# EAGLE board STM32F103C8T6-breakout-board_protoboard (EAGLE 9.4.2)
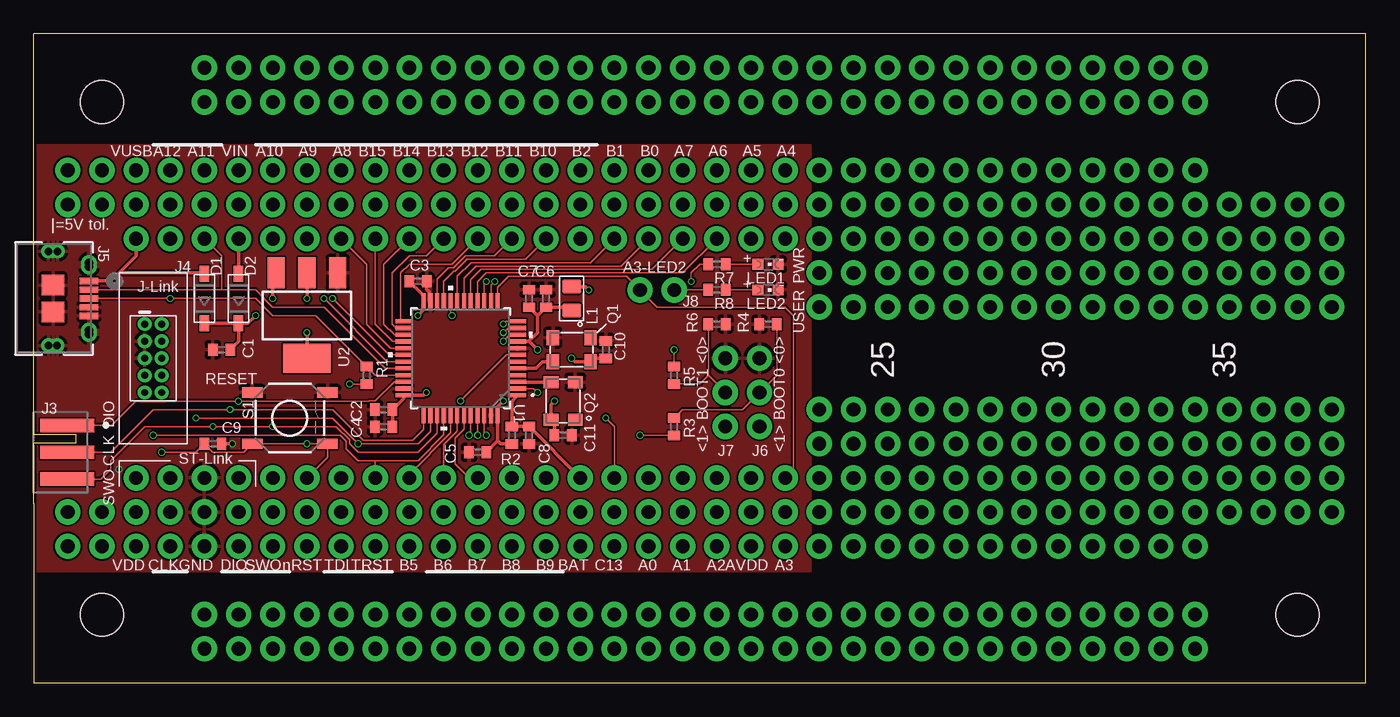
[diagram p0: board, top side]
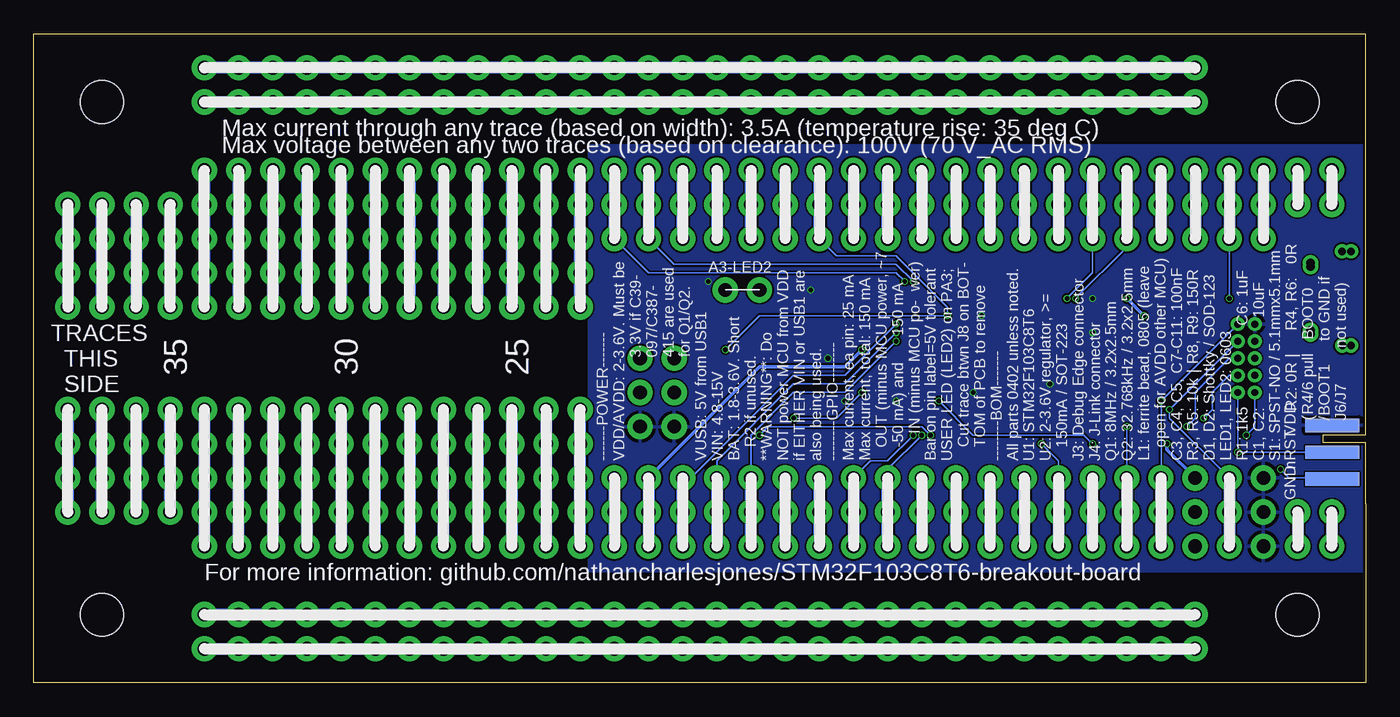
[diagram p1: board, bottom side, seen from below]

Size 99.06 x 48.26 mm. Coordinates in mm from the lower left corner, seen from the top.
Outline: 99.06,0 99.06,48.26 0,48.26 0,34.92 0,18.44 3.17,18.44 3.17,17.86 0,17.86 0,13.34 0,0 99.06,0
Copper layers (1*16): Top 0.035mm / dielectric 1.6mm / Bottom 0.035mm
Design rules "jlcpcb-2layers": minimum track width 5mil, minimum drill 0.3mm, track to track 5mil, track to pad 5mil, pad to pad 5mil, via to via 5mil, smd to smd 5mil, copper to edge 0.2mm, drill to drill 6mil, minimum pad ring 10mil, minimum via ring 3mil, stop-mask expansion 4mil, vias tented up to drill 0mil, thermal gap 10mil
Holes 3.17 mm at 93.98,43.18 93.98,5.08 5.08,43.18 5.08,5.08

## Footprints (pad centres in the part's own frame; a part is rotated, then mirrored left to right if it is on the bottom)
C0402 = smd 0.7 x 0.9: 1 -0.65,0; 2 0.65,0
SOD-123 = smd 1.2 x 0.7: A 1.85,0; C -1.85,0
1X20_NOSILK = drill 1.016 pad 1.88: 1 0,0; 2 2.54,0; 3 5.08,0; 4 7.62,0; 5 10.16,0; 6 12.7,0; 7 15.24,0; 8 17.78,0; 9 20.32,0; 10 22.86,0; 11 25.4,0; 12 27.94,0; 13 30.48,0; 14 33.02,0; 15 35.56,0; 16 38.1,0; 17 40.64,0; 18 43.18,0; 19 45.72,0; 20 48.26,0
AVX_6-PIN_009159006061916_0 = smd 1 x 4: 1 -2,2.5; 2 0,2.5; 3 2,2.5 | smd 1 x 4 bottom: 4 -2,2.5; 5 0,2.5; 6 2,2.5
2X5-PTH-1.27MM = drill 0.508 pad 1: 1 -2.54,-0.635; 2 -2.54,0.635; 3 -1.27,-0.635; 4 -1.27,0.635; 5 0,-0.635; 6 0,0.635; 7 1.27,-0.635; 8 1.27,0.635; 9 2.54,-0.635; 10 2.54,0.635
CONN_10118194-0001LF_AMP = smd 0.457 x 1.346: 1 -1.3,2.594; 2 -0.65,2.594; 3 0,2.594; 4 0.65,2.594; 5 1.3,2.594 | smd 1.499 x 1.651: 10 -1,-0.081; 11 1,-0.081 | smd 1.016 x 1.702: S_1 -3.5,-0.081 | drill 0.559 pad 0.559: S_1_H1 -3.505,0.254; S_1_H2 -3.505,-0.432; S_2_H1 3.505,0.229; S_2_H2 3.505,-0.406 | smd 1.016 x 1.651: S_2 3.5,-0.081 | smd 1.295 x 1.016: S_3 -2.5,2.594; S_4 2.5,2.594 | drill 0.61 pad 0.61: S_3_H1 -2.362,2.591; S_3_H2 -2.642,2.591; S_4_H1 2.642,2.591; S_4_H2 2.362,2.591
1X03_NO_SILK = drill 1.016 pad 1.88: 1 0,0; 2 2.54,0; 3 5.08,0
1X02_NO_SILK = drill 1.016 pad 1.88: 1 0,0; 2 2.54,0
1X04_NO_SILK = drill 1.016 pad 1.88: 1 0,0; 2 2.54,0; 3 5.08,0; 4 7.62,0
1X05_NO_SILK = drill 1.016 pad 1.88: 1 0,0; 2 2.54,0; 3 5.08,0; 4 7.62,0; 5 10.16,0
1X30_NO_SILK = drill 1.016 pad 1.88: 1 0,0; 2 2.54,0; 3 5.08,0; 4 7.62,0; 5 10.16,0; 6 12.7,0; 7 15.24,0; 8 17.78,0; 9 20.32,0; 10 22.86,0; 11 25.4,0; 12 27.94,0; 13 30.48,0; 14 33.02,0; 15 35.56,0; 16 38.1,0; 17 40.64,0; 18 43.18,0; 19 45.72,0; 20 48.26,0; 21 50.8,0; 22 53.34,0; 23 55.88,0; 24 58.42,0; 25 60.96,0; 26 63.5,0; 27 66.04,0; 28 68.58,0; 29 71.12,0; 30 73.66,0
L0805 = smd 1.016 x 1.397: 1 -0.889,0; 2 0.889,0
CHIPLED_0603 = smd 0.8 x 0.8: A 0,-0.75; C 0,0.75
3.2X2.5_KXO-84-TCXO = smd 0.9 x 1.1: 1 -1.4,-0.9; 2 1.4,-0.9; 3 1.4,0.9; 4 -1.4,0.9
R0402 = smd 0.7 x 0.9: 1 -0.65,0; 2 0.65,0
TACTILE_SWITCH_SMD_5.2MM = smd 1.524 x 0.762: 1 -2.794,1.905; 2 2.794,1.905; 3 -2.794,-1.905; 4 2.794,-1.905
LQFP48-7X7MM = smd 1.194 x 0.305: 1 -4.25,2.75; 2 -4.25,2.25; 3 -4.25,1.75; 4 -4.25,1.25; 5 -4.25,0.75; 6 -4.25,0.25; 7 -4.25,-0.25; 8 -4.25,-0.75; 9 -4.25,-1.25; 10 -4.25,-1.75; 11 -4.25,-2.25; 12 -4.25,-2.75; 25 4.25,-2.75; 26 4.25,-2.25; 27 4.25,-1.75; 28 4.25,-1.25; 29 4.25,-0.75; 30 4.25,-0.25; 31 4.25,0.25; 32 4.25,0.75; 33 4.25,1.25; 34 4.25,1.75; 35 4.25,2.25; 36 4.25,2.75 | smd 0.305 x 1.194: 13 -2.75,-4.25; 14 -2.25,-4.25; 15 -1.75,-4.25; 16 -1.25,-4.25; 17 -0.75,-4.25; 18 -0.25,-4.25; 19 0.25,-4.25; 20 0.75,-4.25; 21 1.25,-4.25; 22 1.75,-4.25; 23 2.25,-4.25; 24 2.75,-4.25; 37 2.75,4.25; 38 2.25,4.25; 39 1.75,4.25; 40 1.25,4.25; 41 0.75,4.25; 42 0.25,4.25; 43 -0.25,4.25; 44 -0.75,4.25; 45 -1.25,4.25; 46 -1.75,4.25; 47 -2.25,4.25; 48 -2.75,4.25
SOT-223 = smd 1.27 x 2.286: 1 -2.286,-3.175; 2 0,-3.175; 3 2.286,-3.175 | smd 3.556 x 2.159: TER 0,3.175

## Placement (x,y rotation side)
C1  10uF  [C0402]  13.97,24.77 180 top
C2  10uF  [C0402]  26.04,20.32 180 top
C3  100nF  [C0402]  28.57,29.84 0 top
C4  100nF  [C0402]  26.04,19.05 180 top
C5  100nF  [C0402]  33.02,17.14 180 top
C6  1uF  [C0402]  38.1,28.57 90 top
C7  100nF  [C0402]  36.83,28.57 90 top
C8  100nF  [C0402]  36.83,18.41 270 top
C9  100nF  [C0402]  13.34,17.78 0 top
C10  100nF  [C0402]  42.55,24.77 90 top
C11  100nF  [C0402]  39.37,18.41 0 top
D1  [SOD-123]  12.7,28.57 90 top
D2  [SOD-123]  15.24,28.57 90 top
FRAME2  FRAME-LETTERNO_PACKAGE  [DUMMY]  -10.79,-57.15 0 top  (outside the outline)
J1  [1X20_NOSILK]  55.88,33.02 180 top
J2  [1X20_NOSILK]  55.88,15.24 180 top
J3  AVX_6-PIN_009159006061916  [AVX_6-PIN_009159006061916_0]  0,17.14 270 top
J4  CORTEX_DEBUG_PTH  [2X5-PTH-1.27MM]  8.89,24.13 270 top
J5  10118194-0001LF  [CONN_10118194-0001LF_AMP]  1.52,28.57 270 top
J6  [1X03_NO_SILK]  53.98,24.13 270 top
J7  [1X03_NO_SILK]  51.44,24.13 270 top
J8  [1X02_NO_SILK]  45.09,29.21 0 top
J9  [1X04_NO_SILK]  91.44,27.94 90 top
J10  [1X04_NO_SILK]  91.44,12.7 90 top
J11  [1X04_NO_SILK]  88.9,27.94 90 top
J12  [1X04_NO_SILK]  88.9,12.7 90 top
J13  [1X02_NO_SILK]  2.54,35.56 90 top
J14  [1X02_NO_SILK]  2.54,10.16 90 top
J15  [1X02_NO_SILK]  5.08,35.56 90 top
J16  [1X02_NO_SILK]  5.08,10.16 90 top
J17  [1X02_NO_SILK]  7.62,35.56 90 top
J18  [1X02_NO_SILK]  7.62,10.16 90 top
J19  [1X02_NO_SILK]  10.16,35.56 90 top
J20  [1X02_NO_SILK]  10.16,10.16 90 top
J21  [1X05_NO_SILK]  86.36,27.94 90 top
J22  [1X05_NO_SILK]  86.36,10.16 90 top
J23  [1X05_NO_SILK]  83.82,27.94 90 top
J24  [1X05_NO_SILK]  83.82,10.16 90 top
J25  [1X05_NO_SILK]  81.28,27.94 90 top
J26  [1X05_NO_SILK]  81.28,10.16 90 top
J27  [1X05_NO_SILK]  78.74,27.94 90 top
J28  [1X05_NO_SILK]  78.74,10.16 90 top
J29  [1X05_NO_SILK]  76.2,27.94 90 top
J30  [1X05_NO_SILK]  76.2,10.16 90 top
J31  [1X05_NO_SILK]  73.66,27.94 90 top
J32  [1X05_NO_SILK]  73.66,10.16 90 top
J33  [1X05_NO_SILK]  71.12,27.94 90 top
J34  [1X05_NO_SILK]  71.12,10.16 90 top
J35  [1X05_NO_SILK]  68.58,27.94 90 top
J36  [1X05_NO_SILK]  68.58,10.16 90 top
J37  [1X05_NO_SILK]  66.04,27.94 90 top
J38  [1X05_NO_SILK]  66.04,10.16 90 top
J39  [1X05_NO_SILK]  63.5,27.94 90 top
J40  [1X05_NO_SILK]  63.5,10.16 90 top
J41  [1X05_NO_SILK]  60.96,27.94 90 top
J42  [1X05_NO_SILK]  60.96,10.16 90 top
J43  [1X05_NO_SILK]  58.42,27.94 90 top
J44  [1X05_NO_SILK]  58.42,10.16 90 top
J45  [1X02_NO_SILK]  12.7,35.56 90 top
J46  [1X02_NO_SILK]  12.7,10.16 90 top
J47  [1X02_NO_SILK]  15.24,35.56 90 top
J48  [1X02_NO_SILK]  15.24,10.16 90 top
J49  [1X02_NO_SILK]  17.78,35.56 90 top
J50  [1X02_NO_SILK]  17.78,10.16 90 top
J51  [1X02_NO_SILK]  20.32,35.56 90 top
J52  [1X02_NO_SILK]  20.32,10.16 90 top
J53  [1X02_NO_SILK]  22.86,35.56 90 top
J54  [1X02_NO_SILK]  22.86,10.16 90 top
J55  [1X02_NO_SILK]  25.4,35.56 90 top
J56  [1X02_NO_SILK]  25.4,10.16 90 top
J57  [1X02_NO_SILK]  27.94,35.56 90 top
J58  [1X02_NO_SILK]  27.94,10.16 90 top
J59  [1X02_NO_SILK]  30.48,35.56 90 top
J60  [1X02_NO_SILK]  30.48,10.16 90 top
J61  [1X02_NO_SILK]  33.02,35.56 90 top
J62  [1X02_NO_SILK]  33.02,10.16 90 top
J63  [1X02_NO_SILK]  35.56,35.56 90 top
J64  [1X02_NO_SILK]  35.56,10.16 90 top
J65  [1X02_NO_SILK]  38.1,35.56 90 top
J66  [1X02_NO_SILK]  38.1,10.16 90 top
J67  [1X02_NO_SILK]  40.64,35.56 90 top
J68  [1X02_NO_SILK]  40.64,10.16 90 top
J69  [1X02_NO_SILK]  43.18,35.56 90 top
J70  [1X02_NO_SILK]  43.18,10.16 90 top
J71  [1X02_NO_SILK]  45.72,35.56 90 top
J72  [1X02_NO_SILK]  45.72,10.16 90 top
J73  [1X02_NO_SILK]  48.26,35.56 90 top
J74  [1X02_NO_SILK]  48.26,10.16 90 top
J75  [1X02_NO_SILK]  50.8,35.56 90 top
J76  [1X02_NO_SILK]  50.8,10.16 90 top
J77  [1X02_NO_SILK]  53.34,35.56 90 top
J78  [1X02_NO_SILK]  53.34,10.16 90 top
J79  [1X02_NO_SILK]  55.88,35.56 90 top
J80  [1X02_NO_SILK]  55.88,10.16 90 top
J89  [1X30_NO_SILK]  12.7,5.08 0 top
J90  [1X30_NO_SILK]  12.7,2.54 0 top
J91  [1X04_NO_SILK]  96.52,27.94 90 top
J92  [1X04_NO_SILK]  96.52,12.7 90 top
J93  [1X04_NO_SILK]  93.98,27.94 90 top
J94  [1X30_NO_SILK]  12.7,45.72 0 top
J95  [1X30_NO_SILK]  12.7,43.18 0 top
J96  [1X04_NO_SILK]  93.98,12.7 90 top
L1  470R-2A  [L0805]  40.01,28.57 90 top
LED1  [CHIPLED_0603]  54.61,31.11 270 top
LED2  [CHIPLED_0603]  54.61,29.21 270 top
Q1  [3.2X2.5_KXO-84-TCXO]  40.01,24.77 180 top
Q2  [3.2X2.5_KXO-84-TCXO]  39.37,20.95 90 top
R1  1k5  [R0402]  24.77,22.86 270 top
R2  0R  [R0402]  35.56,18.41 270 top
R3  10k  [R0402]  47.62,19.05 270 top
R4  0R  [R0402]  54.61,26.67 0 top
R5  10k  [R0402]  47.62,22.86 90 top
R6  0R  [R0402]  50.8,26.67 180 top
R7  150R  [R0402]  50.8,31.11 180 top
R8  150R  [R0402]  50.8,29.21 0 top
S1  MOMENTARY-SWITCH-SPST-SMD-5.2-REDUNDANT  [TACTILE_SWITCH_SMD_5.2MM]  19.05,19.68 0 top
U1  STM32F103C8T6  [LQFP48-7X7MM]  31.75,24.13 180 top
U2  CJT1117-3.3-SOT223  [SOT-223]  20.32,27.3 180 top

## Library data of the parts
C1 C2 = adafruit; LCSC_PART: C15525
C3-C5 C7-C11 = adafruit; LCSC_PART: C1525
C6 = adafruit; LCSC_PART: C52923
D1 D2 = adafruit; LCSC_PART: C8598
FRAME2 = SparkFun-Aesthetics; DESIGNER: Nathan Jones; VERSION: v01
J1 J2 J4 J6-J8 J13-J80 J89 J90 J94 J95 = SparkFun-Connectors
J3 = Debug-Edge_AVX-connectors
J5 = USB-micro-B_Amphenol_10118194-0001LF; BUILT_BY: EMA_Cory; COPYRIGHT: Copyright (C) 2018 Accelerated Designs. All rights reserved; DATASHEET: https://www.amphenol-icc.com/media/wysiwyg/files/drawing/10118194.pdf; MANUFACTURER_PART_NUMBER: 10118194-0001LF; SOURCELIBRARY: Amphenol_ICC_2020-04-09; VENDOR: Amphenol
J9-J12 J91-J93 J96 = SparkFun-Connectors; PROD_ID: CONN-09696
L1 = OPL_Ferrite_and_Magnetic_Bead; LCSC_PART: C1015; MPN: WLB2012-471T20
LED1 = adafruit; LCSC_PART: C72041
LED2 = adafruit; LCSC_PART: C72038
Q1 = crystal-geyer_V1_0; LCSC_PART: C39097
Q2 = crystal-geyer_V1_0; LCSC_PART: C387415
R1 = adafruit; LCSC_PART: C25867
R2 R4 R6 = adafruit; LCSC_PART: C17168
R3 R5 = adafruit; LCSC_PART: C25744
R7 R8 = adafruit; LCSC_PART: C25082
S1 = SparkFun-Switches; LCSC_PART: C318884; PROD_ID: SWCH-08247; SF_SKU: COM-08720
U1 = STM32F103C8T6; BUILT_BY: EMA_UL_Team; COPYRIGHT: Copyright (C) 2018 Accelerated Designs. All rights reserved; LCSC_PART: C94046; MANUFACTURER_PART_NUMBER: STM32F103C8T6; SOURCELIBRARY: Updates_to_database_2020-10-19; VENDOR: STMicroelectronics
U2 = OPL_IC; LCSC_PART: C6186; MPN: CJT1117-3.3

## Nets
AVDD: C6.1 C7.1 J2.2 J78.1 J78.2 L1.1 U1.9
BOOT0: R3.2 U1.44
BOOT1*: J1.7 J67.1 J67.2 R5.2 U1.20
GND: C1.2 C2.2 C3.2 C4.2 C5.2 C6.2 C7.2 C8.2 C9.2 C10.2 C11.2 J2.18 J3.6 J4.3 J4.5 J5.4 J5.5 J5.10 J5.11 J5.S_1 J5.S_1_H1 J5.S_1_H2 J5.S_2 J5.S_2_H1 J5.S_2_H2 J5.S_3 J5.S_3_H1 J5.S_3_H2 J5.S_4 J5.S_4_H1 J5.S_4_H2 J6.1 J7.1 J46.1 J46.2 LED1.C LED2.C Q1.2 Q2.2 R4.1 R6.1 S1.1 S1.2 U1.8 U1.23 U1.35 U1.47 U2.1
JTDI*: J2.14 J4.8 J54.1 J54.2 U1.38
JTRST*: J2.13 J4.9 J56.1 J56.2 U1.40
N$1: J90.1 J90.2 J90.3 J90.4 J90.5 J90.6 J90.7 J90.8 J90.9 J90.10 J90.11 J90.12 J90.13 J90.14 J90.15 J90.16 J90.17 J90.18 J90.19 J90.20 J90.21 J90.22 J90.23 J90.24 J90.25 J90.26 J90.27 J90.28 J90.29 J90.30
N$2: J89.1 J89.2 J89.3 J89.4 J89.5 J89.6 J89.7 J89.8 J89.9 J89.10 J89.11 J89.12 J89.13 J89.14 J89.15 J89.16 J89.17 J89.18 J89.19 J89.20 J89.21 J89.22 J89.23 J89.24 J89.25 J89.26 J89.27 J89.28 J89.29 J89.30
N$3: J95.1 J95.2 J95.3 J95.4 J95.5 J95.6 J95.7 J95.8 J95.9 J95.10 J95.11 J95.12 J95.13 J95.14 J95.15 J95.16 J95.17 J95.18 J95.19 J95.20 J95.21 J95.22 J95.23 J95.24 J95.25 J95.26 J95.27 J95.28 J95.29 J95.30
N$4: J94.1 J94.2 J94.3 J94.4 J94.5 J94.6 J94.7 J94.8 J94.9 J94.10 J94.11 J94.12 J94.13 J94.14 J94.15 J94.16 J94.17 J94.18 J94.19 J94.20 J94.21 J94.22 J94.23 J94.24 J94.25 J94.26 J94.27 J94.28 J94.29 J94.30
N$5: J92.1 J92.2 J92.3 J92.4
N$6: J96.1 J96.2 J96.3 J96.4
N$7: J10.1 J10.2 J10.3 J10.4
N$8: J12.1 J12.2 J12.3 J12.4
N$9: J22.1 J22.2 J22.3 J22.4 J22.5
N$10: J24.1 J24.2 J24.3 J24.4 J24.5
N$11: J26.1 J26.2 J26.3 J26.4 J26.5
N$12: J28.1 J28.2 J28.3 J28.4 J28.5
N$13: J30.1 J30.2 J30.3 J30.4 J30.5
N$14: J32.1 J32.2 J32.3 J32.4 J32.5
N$15: J34.1 J34.2 J34.3 J34.4 J34.5
N$16: J36.1 J36.2 J36.3 J36.4 J36.5
N$17: J38.1 J38.2 J38.3 J38.4 J38.5
N$18: J40.1 J40.2 J40.3 J40.4 J40.5
N$19: J42.1 J42.2 J42.3 J42.4 J42.5
N$20: J44.1 J44.2 J44.3 J44.4 J44.5
N$21: J13.1 J13.2
N$22: J14.1 J14.2
N$23: J16.1 J16.2
N$24: J15.1 J15.2
N$40: J91.1 J91.2 J91.3 J91.4
N$41: J93.1 J93.2 J93.3 J93.4
N$42: J9.1 J9.2 J9.3 J9.4
N$43: J11.1 J11.2 J11.3 J11.4
N$44: J21.1 J21.2 J21.3 J21.4 J21.5
N$45: J23.1 J23.2 J23.3 J23.4 J23.5
N$46: J25.1 J25.2 J25.3 J25.4 J25.5
N$47: J27.1 J27.2 J27.3 J27.4 J27.5
N$48: J29.1 J29.2 J29.3 J29.4 J29.5
N$49: J31.1 J31.2 J31.3 J31.4 J31.5
N$50: J33.1 J33.2 J33.3 J33.4 J33.5
N$51: J35.1 J35.2 J35.3 J35.4 J35.5
N$52: J37.1 J37.2 J37.3 J37.4 J37.5
N$53: J39.1 J39.2 J39.3 J39.4 J39.5
N$54: J41.1 J41.2 J41.3 J41.4 J41.5
N$55: J43.1 J43.2 J43.3 J43.4 J43.5
N$81: J6.2 R3.1 R4.2
N$82: J7.2 R5.1 R6.2
N$83: LED2.A R8.2
N$84: LED1.A R7.1
NRST: C9.1 J2.15 J3.5 J4.10 J52.1 J52.2 S1.3 S1.4 U1.7
OSC32_IN: Q2.3 U1.3
OSC32_OUT: U1.4
OSC_IN: Q1.3 U1.5
OSC_OUT: U1.6
PA0: J2.5 J72.1 J72.2 U1.10
PA1: J2.4 J74.1 J74.2 U1.11
PA2: J2.3 J76.1 J76.2 U1.12
PA3: J2.1 J8.1 J8.2 J80.1 J80.2 R8.1 U1.13
PA4: J1.1 J79.1 J79.2 U1.14
PA5: J1.2 J77.1 J77.2 U1.15
PA6: J1.3 J75.1 J75.2 U1.16
PA7: J1.4 J73.1 J73.2 U1.17
PA8*: J1.14 J53.1 J53.2 U1.29
PA9*: J1.15 J51.1 J51.2 U1.30
PA10*: J1.16 J49.1 J49.2 U1.31
PB0: J1.5 J71.1 J71.2 U1.18
PB1: J1.6 J69.1 J69.2 U1.19
PB5: J2.12 J58.1 J58.2 U1.41
PB6*: J2.11 J60.1 J60.2 U1.42
PB7*: J2.10 J62.1 J62.2 U1.43
PB8*: J2.9 J64.1 J64.2 U1.45
PB9*: J2.8 J66.1 J66.2 U1.46
PB10*: J1.8 J65.1 J65.2 U1.21
PB11*: J1.9 J63.1 J63.2 U1.22
PB12*: J1.10 J61.1 J61.2 U1.25
PB13*: J1.11 J59.1 J59.2 U1.26
PB14*: J1.12 J57.1 J57.2 U1.27
PB15*: J1.13 J55.1 J55.2 U1.28
PC13: J2.6 J70.1 J70.2 U1.2
SWCLK*: J2.19 J3.2 J4.4 J20.1 J20.2 U1.37
SWDIO*: J2.17 J3.1 J4.2 J48.1 J48.2 U1.34
SWO*: J2.16 J3.3 J4.6 J50.1 J50.2 U1.39
USB_DM*: J1.18 J5.2 J45.1 J45.2 U1.32
USB_DP*: J1.19 J5.3 J19.1 J19.2 R1.1 U1.33
VBAT_1.8-3.6V: C8.1 J2.7 J68.1 J68.2 R2.1 U1.1
VDD: C2.1 C3.1 C4.1 C5.1 C10.1 C11.1 J2.20 J3.4 J4.1 J6.3 J7.3 J18.1 J18.2 L1.2 Q1.4 Q2.4 R1.2 R2.2 R7.2 U1.24 U1.36 U1.48 U2.2 U2.TER
VIN: C1.1 D1.C D2.C U2.3
VIN_4.8-15V: D2.A J1.17 J47.1 J47.2
VUSB: D1.A J1.20 J5.1 J17.1 J17.2

## Tracks (layer width: path | path; a pad name or v marks a point on that pad's centre or on a via)
AVDD  (via drill 0.35)
  Top 0.254: 36.81,25.38 37.47,26.04 37.47,27.3 | 37.47,27.3 38.09,27.93 C6.1 39.77,27.93 L1.1 | C7.1 36.84,27.93 37.47,27.3 | 36.81,25.38 36.85,25.38 v37.47,24.77 | 36.81,25.38 U1.9
  Bottom 0.254: v37.47,24.77 38.73,23.5 45.09,23.5 J2.2
  Bottom 0.889: J2.2 J78.2 J78.1
BOOT0  (via drill 0.35)
  Top 0.127: U1.44 32.5,18.53 v32.38,18.41 | R3.2 47.61,18.41 v45.09,18.41
  Bottom 0.127: v32.38,18.41 33.02,19.05 44.45,19.05 v45.09,18.41
BOOT1*  (via drill 0.35)
  Top 0.127: U1.20 31,27.42 v31.11,27.3 | v47.62,24.77 R5.2
  Bottom 0.127: J1.7 39.37,31.75 34.92,31.75 31.11,27.94 v31.11,27.3 45.09,27.3 v47.62,24.77
  Bottom 0.889: J1.7 J67.1 J67.2
GND  (via drill 0.35)
  Top 0.254: U1.23 29.41,28.47 29.41,29.08 29.23,29.26 C3.2 | C9.2 v14.79,17.78
  Bottom 0.127: J3.6 2.6,15.24 5.71,15.24 v6.35,15.88
  Bottom 0.254: v14.79,17.78 14.79,17.32 J2.18
  pour Top: 57.78,40.01 57.78,8.26 0,8.26 0,40.01
JTDI*  (via drill 0.35)
  Top 0.127: U1.38 29.5,18.7 28.57,17.78 v24.13,17.78 22.23,19.68 v12.06,19.68
  Bottom 0.127: J4.8 10.16,22.86 11.43,21.59 11.43,20.32 v12.06,19.68 | v24.13,17.78 22.86,16.51 J2.14
  Bottom 0.889: J2.14 J54.2 J54.1
JTRST*  (via drill 0.35)
  Top 0.127: U1.40 30.5,18.43 28.57,16.51 25.4,16.51 | 25.4,16.51 24.13,16.51 23.24,17.4 23.24,17.95 22.78,18.41 14.42,18.41 14.41,18.42 12.26,18.42 12.25,18.41 v8.89,18.41 | J2.13 25.4,16.51
  Bottom 0.127: J4.9 8.26,19.05 v8.89,18.41
  Bottom 0.889: J56.1 J56.2 J2.13
N$1
  Bottom 0.889: J90.30 J90.29 J90.28 J90.27 J90.26 J90.25 J90.24 J90.23 J90.22 J90.21 J90.20 J90.19 J90.18 J90.17 J90.16 J90.15 J90.14 J90.13 J90.12 J90.11 J90.10 J90.9 J90.8 J90.7 J90.6 J90.5 J90.4 J90.3 J90.2 J90.1
N$2
  Bottom 0.889: J89.1 J89.2 J89.3 J89.4 J89.5 J89.6 J89.7 J89.8 J89.9 J89.10 J89.11 J89.12 J89.13 J89.14 J89.15 J89.16 J89.17 J89.18 J89.19 J89.20 J89.21 J89.22 J89.23 J89.24 J89.25 J89.26 J89.27 J89.28 J89.29 J89.30
N$3
  Bottom 0.889: J95.30 J95.29 J95.28 J95.27 J95.26 J95.25 J95.24 J95.23 J95.22 J95.21 J95.20 J95.19 J95.18 J95.17 J95.16 J95.15 J95.14 J95.13 J95.12 J95.11 J95.10 J95.9 J95.8 J95.7 J95.6 J95.5 J95.4 J95.3 J95.2 J95.1
N$4
  Bottom 0.889: J94.1 J94.2 J94.3 J94.4 J94.5 J94.6 J94.7 J94.8 J94.9 J94.10 J94.11 J94.12 J94.13 J94.14 J94.15 J94.16 J94.17 J94.18 J94.19 J94.20 J94.21 J94.22 J94.23 J94.24 J94.25 J94.26 J94.27 J94.28 J94.29 J94.30
N$5
  Bottom 0.889: J92.4 J92.3 J92.2 J92.1
N$6
  Bottom 0.889: J96.1 J96.2 J96.3 J96.4
N$7
  Bottom 0.889: J10.4 J10.3 J10.2 J10.1
N$8
  Bottom 0.889: J12.1 J12.2 J12.3 J12.4
N$9
  Bottom 0.889: J22.5 J22.4 J22.3 J22.2 J22.1
N$10
  Bottom 0.889: J24.1 J24.2 J24.3 J24.4 J24.5
N$11
  Bottom 0.889: J26.5 J26.4 J26.3 J26.2 J26.1
N$12
  Bottom 0.889: J28.1 J28.2 J28.3 J28.4 J28.5
N$13
  Bottom 0.889: J30.5 J30.4 J30.3 J30.2 J30.1
N$14
  Bottom 0.889: J32.1 J32.2 J32.3 J32.4 J32.5
N$15
  Bottom 0.889: J34.5 J34.4 J34.3 J34.2 J34.1
N$16
  Bottom 0.889: J36.1 J36.2 J36.3 J36.4 J36.5
N$17
  Bottom 0.889: J38.5 J38.4 J38.3 J38.2 J38.1
N$18
  Bottom 0.889: J40.1 J40.2 J40.3 J40.4 J40.5
N$19
  Bottom 0.889: J42.5 J42.4 J42.3 J42.2 J42.1
N$20
  Bottom 0.889: J44.1 J44.2 J44.3 J44.4 J44.5
N$21
  Bottom 0.889: J13.2 J13.1
N$22
  Bottom 0.889: J14.2 J14.1
N$23
  Bottom 0.889: J16.2 J16.1
N$24
  Bottom 0.889: J15.1 J15.2
N$40
  Bottom 0.889: J91.4 J91.3 J91.2 J91.1
N$41
  Bottom 0.889: J93.1 J93.2 J93.3 J93.4
N$42
  Bottom 0.889: J9.4 J9.3 J9.2 J9.1
N$43
  Bottom 0.889: J11.1 J11.2 J11.3 J11.4
N$44
  Bottom 0.889: J21.5 J21.4 J21.3 J21.2 J21.1
N$45
  Bottom 0.889: J23.1 J23.2 J23.3 J23.4 J23.5
N$46
  Bottom 0.889: J25.5 J25.4 J25.3 J25.2 J25.1
N$47
  Bottom 0.889: J27.1 J27.2 J27.3 J27.4 J27.5
N$48
  Bottom 0.889: J29.5 J29.4 J29.3 J29.2 J29.1
N$49
  Bottom 0.889: J31.1 J31.2 J31.3 J31.4 J31.5
N$50
  Bottom 0.889: J33.5 J33.4 J33.3 J33.2 J33.1
N$51
  Bottom 0.889: J35.1 J35.2 J35.3 J35.4 J35.5
N$52
  Bottom 0.889: J37.5 J37.4 J37.3 J37.2 J37.1
N$53
  Bottom 0.889: J39.1 J39.2 J39.3 J39.4 J39.5
N$54
  Bottom 0.889: J41.5 J41.4 J41.3 J41.2 J41.1
N$55
  Bottom 0.889: J43.1 J43.2 J43.3 J43.4 J43.5
N$81
  Top 0.127: R4.2 55.26,22.88 J6.2 52.7,20.32 48.24,20.32 R3.1
N$82
  Top 0.127: R5.1 47.64,22.23 49.53,22.23 50.16,22.86 | J7.2 50.16,22.86 | R6.2 50.16,26.66 50.16,22.86
N$83
  Top 0.127: LED2.A R8.2
N$84
  Top 0.127: LED1.A R7.1
NRST  (via drill 0.35)
  Top 0.127: U1.7 35.17,24.38 v31.75,20.95 | v9.53,17.14 12.05,17.14 C9.1 13.32,17.14 13.55,17.14 13.56,17.14 15.62,17.14 S1.3 v20.32,17.78 S1.4 21.84,16.76 J2.15
  Bottom 0.127: J4.10 v9.53,17.14 J3.5 | v31.75,20.95 29.21,18.41 20.95,18.41 v20.32,17.78
  Bottom 0.889: J52.1 J52.2 J2.15
OSC32_IN
  Top 0.254: Q2.3 36.02,22.36 U1.3
OSC_IN
  Top 0.254: U1.5 37.35,23.38 37.84,23.86 Q1.3
PA0  (via drill 0.35)
  Top 0.127: U1.10 35.41,25.88 v34.92,25.4
  Bottom 0.127: v34.92,25.4 38.73,21.59 42.55,21.59 45.72,18.41 J2.5
  Bottom 0.889: J72.1 J72.2 J2.5
PA1  (via drill 0.35)
  Top 0.127: U1.11 35.27,26.38 v34.92,26.04
  Bottom 0.127: v34.92,26.04 38.73,22.23 42.55,22.23 48.26,16.51 J2.4
  Bottom 0.889: J2.4 J74.2 J74.1
PA2  (via drill 0.35)
  Top 0.127: U1.12 35.13,26.88 v34.92,26.67
  Bottom 0.127: v34.92,26.67 38.73,22.86 42.55,22.86 50.16,15.24 J2.3
  Bottom 0.889: J76.1 J76.2 J2.3
PA3
  Top 0.127: J8.2 R8.1 | U1.13 34.5,29.42 35.31,30.23 44.07,30.23 J8.1 46.35,27.94 55.88,27.94 56.52,27.3 56.52,15.88 J2.1
  Bottom 0.127: J8.1 J8.2
  Bottom 0.889: J80.1 J80.2 J2.1
PA4  (via drill 0.35)
  Top 0.127: U1.14 34,29.55 v34.29,29.84
  Bottom 0.127: v34.29,29.84 34.92,30.48 53.34,30.48 J1.1
  Bottom 0.889: J1.1 J79.1 J79.2
PA5  (via drill 0.35)
  Top 0.127: U1.15 33.5,29.69 v33.66,29.84
  Bottom 0.127: v33.66,29.84 34.92,31.11 51.44,31.11 J1.2
  Bottom 0.889: J77.2 J77.1 J1.2
PA6
  Top 0.127: U1.16 33,29.82 33.66,30.48 48.26,30.48 J1.3
  Bottom 0.889: J1.3 J75.1 J75.2
PA7
  Top 0.127: U1.17 32.5,29.96 33.27,30.73 45.97,30.73 J1.4
  Bottom 0.889: J73.2 J73.1 J1.4
PA8*
  Top 0.127: U1.29 26.55,24.88 24.77,26.67 24.77,31.11 J1.14
  Bottom 0.889: J53.2 J53.1 J1.14
PA9*  (via drill 0.35)
  Top 0.127: U1.30 26.42,24.38 v22.23,28.57
  Bottom 0.127: v22.23,28.57 20.32,30.48 J1.15
  Bottom 0.889: J1.15 J51.1 J51.2
PA10*  (via drill 0.35)
  Top 0.127: U1.31 26.29,23.88 v21.59,28.57
  Bottom 0.127: v21.59,28.57 17.78,32.38 J1.16
  Bottom 0.889: J49.2 J49.1 J1.16
PB0
  Top 0.127: U1.18 32,30.09 32.89,30.99 43.69,30.99 J1.5
  Bottom 0.889: J1.5 J71.1 J71.2
PB1
  Top 0.127: U1.19 31.5,30.23 32.51,31.24 41.4,31.24 J1.6
  Bottom 0.889: J69.2 J69.1 J1.6
PB5
  Top 0.127: U1.41 31,18.58 27.94,15.52 J2.12
  Bottom 0.889: J2.12 J58.2 J58.1
PB6*
  Top 0.127: U1.42 31.5,18.72 30.48,17.7 J2.11
  Bottom 0.889: J60.1 J60.2 J2.11
PB7*
  Top 0.127: U1.43 32,18.86 31.34,18.19 31.34,16.29 32.38,15.24 J2.10
  Bottom 0.889: J2.10 J62.2 J62.1
PB8*  (via drill 0.35)
  Top 0.127: U1.45 33.02,19.86 v33.02,18.41
  Bottom 0.127: v33.02,18.41 35.56,15.88 J2.9
  Bottom 0.889: J64.1 J64.2 J2.9
PB9*  (via drill 0.35)
  Top 0.127: U1.46 33.5,18.57 v33.66,18.41
  Bottom 0.127: v33.66,18.41 35.56,16.51 36.83,16.51 J2.8
  Bottom 0.889: J2.8 J66.2 J66.1
PB10*
  Top 0.127: U1.21 30.5,29.86 31.24,30.61 31.32,30.61 32.21,31.5 36.58,31.5 J1.8
  Bottom 0.889: J65.2 J65.1 J1.8
PB11*
  Top 0.127: U1.22 30,30 30.86,30.86 31.22,30.86 32.11,31.75 34.29,31.75 J1.9
  Bottom 0.889: J1.9 J63.1 J63.2
PB12*
  Top 0.127: U1.25 27.3,27.07 27.3,30.48 27.94,31.11 31.11,31.11 J1.10
  Bottom 0.889: J61.2 J61.1 J1.10
PB13*
  Top 0.127: U1.26 26.96,26.38 26.67,26.67 26.67,30.48 27.94,31.75 29.21,31.75 J1.11
  Bottom 0.889: J1.11 J59.1 J59.2
PB14*
  Top 0.127: U1.27 26.82,25.88 26.04,26.67 26.04,31.11 J1.12
  Bottom 0.889: J57.2 J57.1 J1.12
PB15*
  Top 0.127: U1.28 26.69,25.38 25.4,26.67 J1.13
  Bottom 0.889: J1.13 J55.1 J55.2
PC13  (via drill 0.35)
  Top 0.127: U1.2 37.17,21.88 v37.47,21.59 | v42.55,19.68 43.18,19.05 J2.6
  Bottom 0.127: v37.47,21.59 39.37,19.68 v42.55,19.68
  Bottom 0.889: J2.6 J70.2 J70.1
SWCLK*  (via drill 0.35)
  Top 0.127: U1.37 29,18.84 28.19,18.03 24.51,18.03 22.23,20.32 v14.61,20.32 8.89,20.32 5.71,17.14 J3.2
  Bottom 0.127: J4.4 v14.61,20.32 14.61,19.68 J2.19
  Bottom 0.889: J2.19 J20.2 J20.1
SWDIO*  (via drill 0.35)
  Top 0.127: U1.34 26.82,22.38 25.41,20.96 24.96,20.96 24.94,20.94 v15.23,20.94 9.86,20.94 9.81,20.89 7.97,20.89 7.92,20.94 7.61,20.94 5.81,19.14 J3.1
  Bottom 0.127: J4.2 15.23,20.97 v15.23,20.94 15.23,15.25 J2.17
  Bottom 0.889: J2.17 J48.2 J48.1
SWO*  (via drill 0.35)
  Top 0.127: U1.39 30,18.57 28.57,17.14 24.13,17.14 23.5,17.78 23.5,18.06 22.5,19.05 v17.78,19.05 v13.34,19.05 8.26,19.05 5.71,16.51 5.71,15.88 4.99,15.14 J3.3
  Bottom 0.127: J4.6 10.16,24.13 12.7,21.59 12.7,19.68 v13.34,19.05 | J2.16 v17.78,19.05
  Bottom 0.889: J2.16 J50.2 J50.1
USB_DM*
  Top 0.127: U1.32 26.15,23.38 21.59,27.94 17.78,27.94 16.5,29.23 13.97,29.23 | 13.97,29.23 J5.2 | 13.97,29.23 13.97,31.75 J1.18
  Bottom 0.889: J45.2 J45.1 J1.18
USB_DP*  (via drill 0.35)
  Top 0.127: U1.33 25.39,22.88 R1.1 20.97,27.3 17.78,27.3 16.51,28.57 v10.16,28.57 J5.3
  Bottom 0.127: J1.19 v10.16,28.57
  Bottom 0.889: J19.2 J19.1 J1.19
VBAT_1.8-3.6V
  Top 0.254: U1.1 35.56,20.94 R2.1 C8.1 40.64,15.26 J2.7
  Bottom 0.889: J68.1 J68.2 J2.7
VDD  (via drill 0.35)
  Top 0.127: R1.2 23.51,22.21 v23.5,22.23 | R7.2 49.53,31.11 48.9,30.48 v48.9,29.84
  Top 0.254: C11.1 38.72,19.3 Q2.4 38.47,20.69 v38.73,20.95 | v34.92,20.95 34.5,20.53 U1.48 34.5,17.99 | C4.1 C2.1 27.5,21.14 U1.36 29,21.38 v29.21,21.59 | v28.57,27.3 29,27.73 U1.24 29,28.77 C3.1 | U2.2 v20.32,28.57 | U2.TER v20.32,26.04 | C5.1 33.67,17.16 34.5,17.99 | R2.2 34.73,17.77 34.5,17.99 | L1.2 41.02,29.46 v41.27,29.21 | C10.1 41.66,24.11 Q1.4 40.27,23.86 v40.01,24.13
  pour Bottom: 57.78,40.01 57.78,8.26 0,8.26 0,40.01
VIN  (via drill 0.35)
  Top 0.254: D2.C D1.C | D2.C 15.24,25.39 C1.1 | D2.C 15.93,26.73 v16.51,27.3 | v17.78,28.57 17.78,30.23 U2.3
  Bottom 0.254: v16.51,27.3 v17.78,28.57
VIN_4.8-15V
  Top 0.254: J1.17 D2.A
  Bottom 0.889: J47.2 J47.1 J1.17
VUSB
  Top 0.254: J5.1 5.75,29.88 6.35,30.48 | 6.35,30.48 12.64,30.48 D1.A | J1.20 7.62,31.75 6.35,30.48
  Bottom 0.889: J17.2 J17.1 J1.20

## Text on the board
tPlace: ST-Link
bPlace: 25 | 30 | 35
tNames: VUSB | A12 | A11 | VIN | A10 | A9 | A8 | B15 | B14 | B13 | B12 | B11 | B10 | B2 | B1 | B0 | A7 | A6 | A5 | A4 | |=5V tol. | PWR | + - | J-Link | A3-LED2 | + - | USER | 25 | 30 | 35 | RESET | DIO | CLK | <1> BOOT1 <0> | <1> BOOT0 <0> | SWO | VDD | CLK | GND | DIO | SWO | nRST | TDI | TRST | B5 | B6 | B7 | B8 | B9 | BAT | C13 | A0 | A1 | A2 | AVDD | A3
bNames: Max current through any trace (based on width): 3.5A (temperature rise: 35 deg C) | Max voltage between any two traces (based on clearance): 100V (70 V_AC RMS) | A3-LED2 | TRACES / THIS / SIDE | VDD | -------POWER------- / VDD/AVDD: 2-3.6V. Must be / 3.3V if C39- / 097/C387- / 415 are used / for Q1/Q2. / VUSB: 5V from USB1 / VIN: 4.8-15V / BAT: 1.8-3.6V. Short / R2 if unused. / **WARNING**: Do / NOT power MCU from VDD / if EITHER VIN or USB1 are / also being used. / --------GPIO-------- / Max current, ea pin: 25 mA / Max current, total: 150 mA / OUT (minus MCU power, ~7 / -50 mA) and 150 mA / IN (minus MCU po- wer) / Bar on pin label=5V tolerant / USER LED (LED2) on PA3; / Cut trace btwn J8 on BOT- / TOM of PCB to remove / --------BOM------- / All parts 0402 unless noted. / U1: STM32F103C8T6 / U2: 2-3.6V regulator, >= / 150mA / SOT-223 / J3: Debug Edge connector / J4: J-Link connector / Q1: 8MHz / 3.2x2.5mm / Q2: 32.768kHz / 3.2x2.5mm / L1: ferrite bead, 0805 (leave / open for AVDD other MCU) / C3, C4, C5, C7-C11: 100nF / R3, R5: 10k | R8, R9: 150R / D1, D2: Shottky / SOD-123 / LED1, LED2: 0603 / R1: 1k5 C6: 1uF / C1, C2: 10uF / S1: SPST-NO / 5.1mmx5.1mm / R2: 0R | R4, R6: 0R / (R4/6 pull BOOT0 / /BOOT1 to GND if / J6/J7 not used) | nRST | GND | For more information: github.com/nathancharlesjones/STM32F103C8T6-breakout-board